# EAGLE board p8x-regbank-card-full (EAGLE 9.6.2)
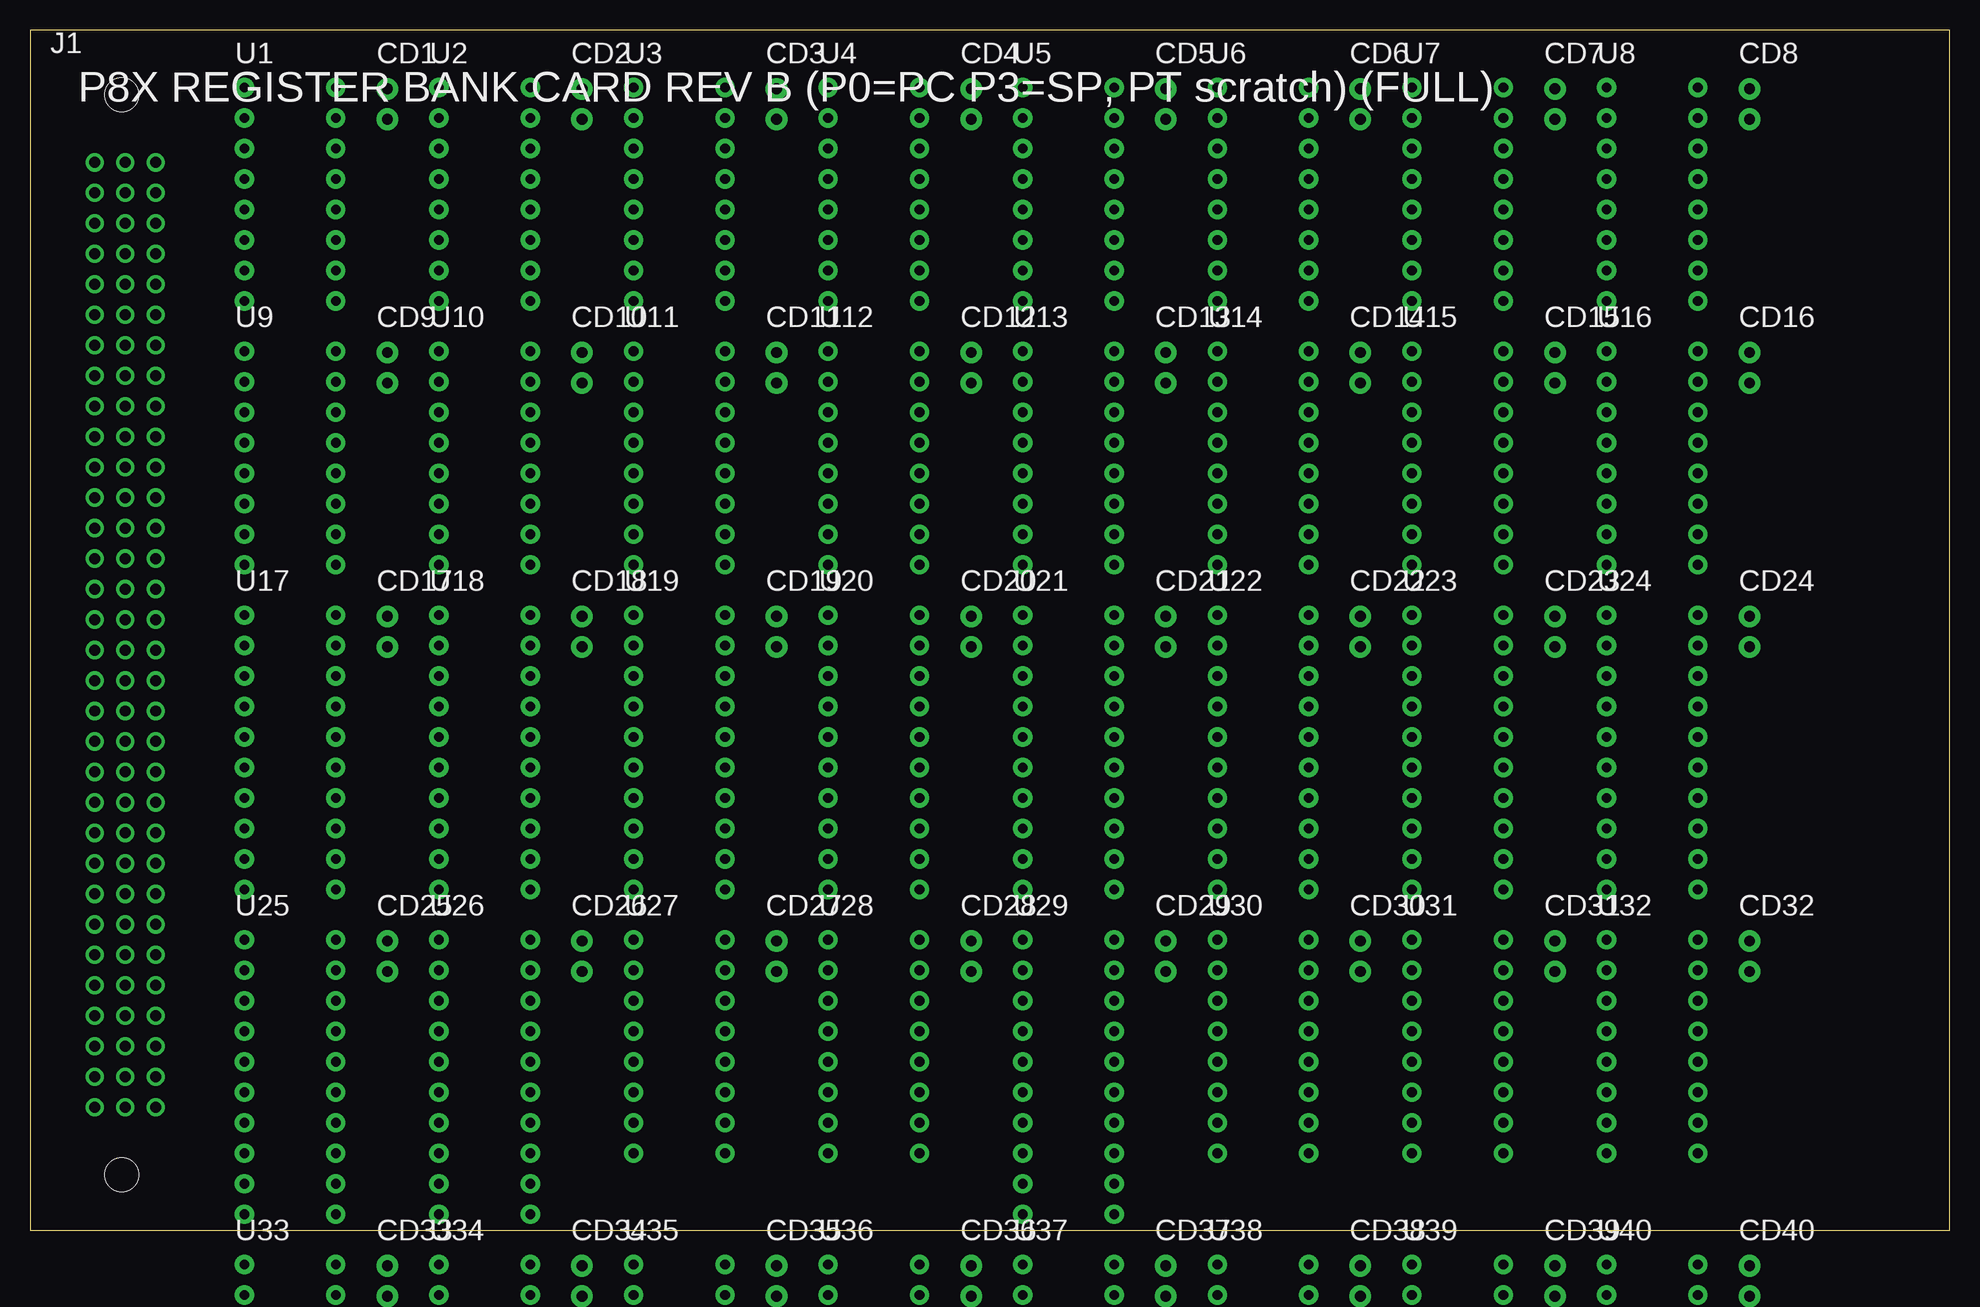
[diagram p0: board, top side]
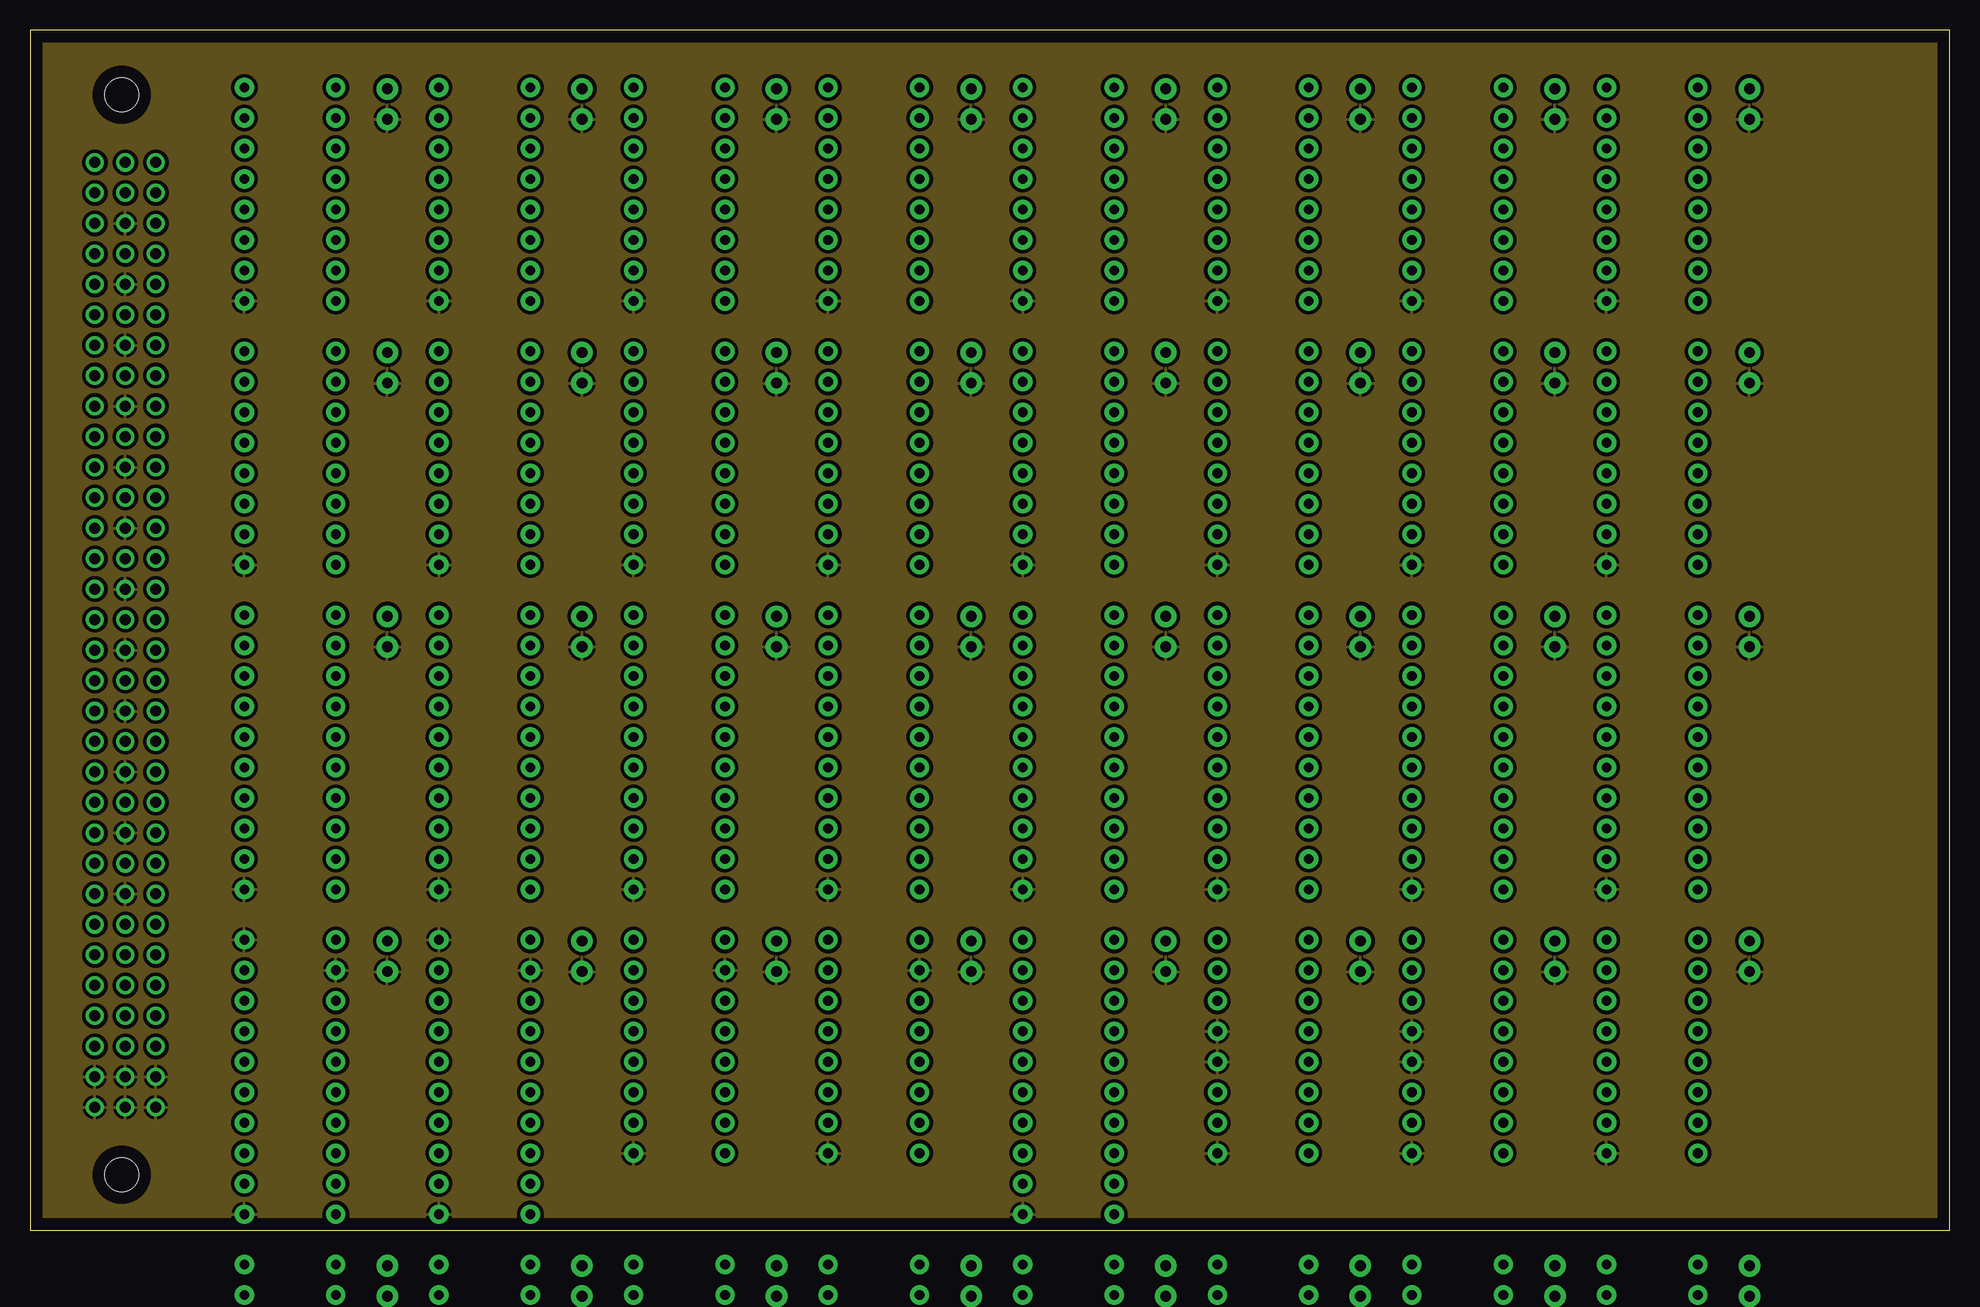
[diagram p1: board, inner layer Route2]
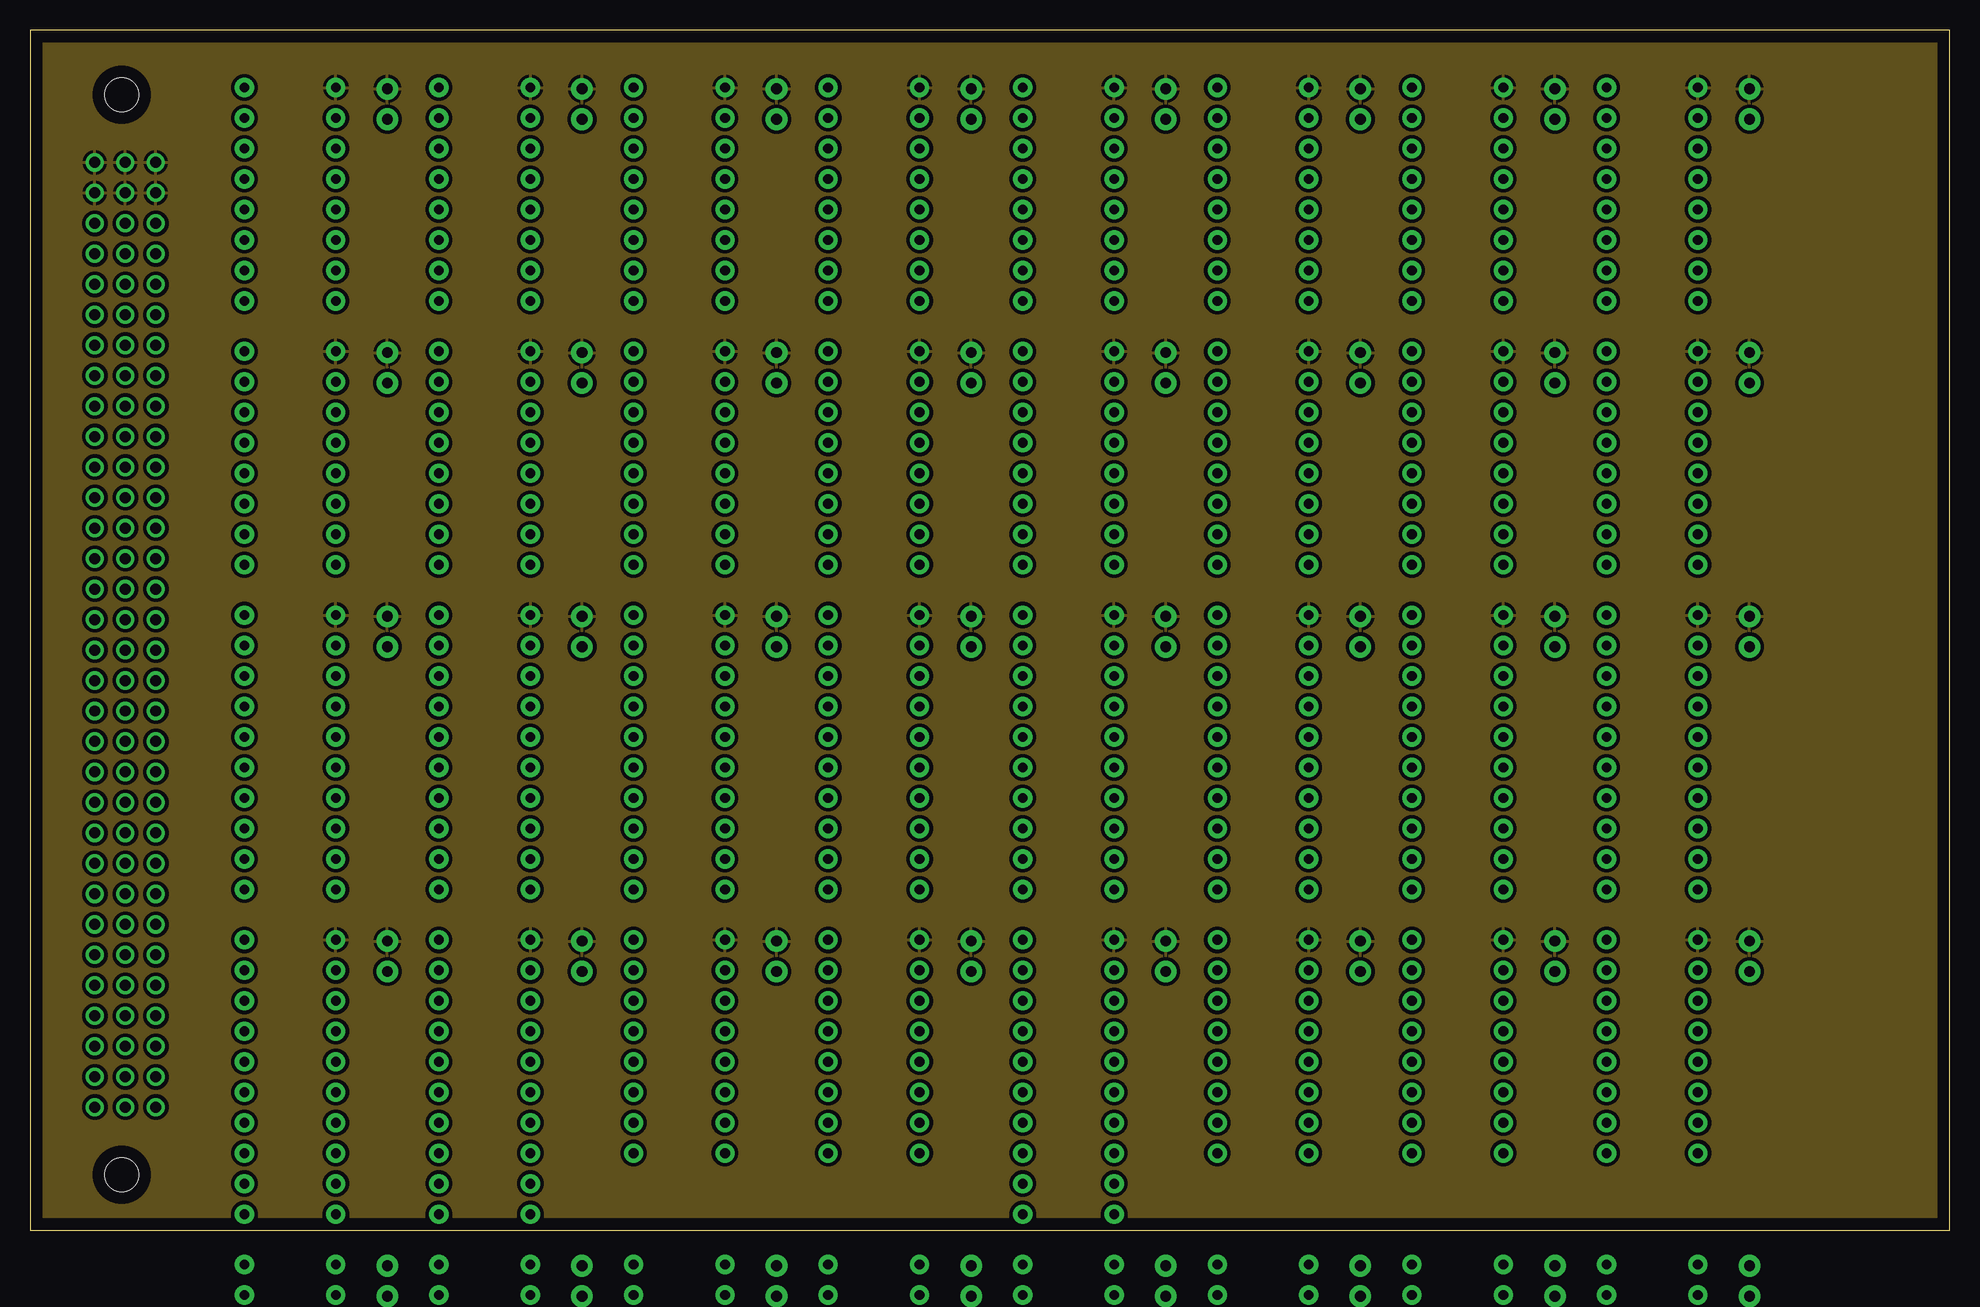
[diagram p2: board, inner layer Route15]

Size 160 x 100 mm. Coordinates in mm from the lower left corner, seen from the top.
Outline: 0,0 160,0 160,100 0,100 0,0
Copper layers (1*2*15*16): Top / Route2 / Route15 / Bottom

## Footprints (pad centres in the part's own frame; a part is rotated, then mirrored left to right if it is on the bottom)
C_DISC1 = drill 0.9 pad 1.8: 1 0,0; 2 0,-2.54
MABC96R = drill 0.914 pad 1.524: A1 -2.54,39.37; A2 -2.54,36.83; A3 -2.54,34.29; A4 -2.54,31.75; A5 -2.54,29.21; A6 -2.54,26.67; A7 -2.54,24.13; A8 -2.54,21.59; A9 -2.54,19.05; A10 -2.54,16.51; A11 -2.54,13.97; A12 -2.54,11.43; A13 -2.54,8.89; A14 -2.54,6.35; A15 -2.54,3.81; A16 -2.54,1.27; A17 -2.54,-1.27; A18 -2.54,-3.81; A19 -2.54,-6.35; A20 -2.54,-8.89; A21 -2.54,-11.43; A22 -2.54,-13.97; A23 -2.54,-16.51; A24 -2.54,-19.05; A25 -2.54,-21.59; A26 -2.54,-24.13; A27 -2.54,-26.67; A28 -2.54,-29.21; A29 -2.54,-31.75; A30 -2.54,-34.29; A31 -2.54,-36.83; A32 -2.54,-39.37; B1 0,39.37; B2 0,36.83; B3 0,34.29; B4 0,31.75; B5 0,29.21; B6 0,26.67; B7 0,24.13; B8 0,21.59; B9 0,19.05; B10 0,16.51; B11 0,13.97; B12 0,11.43; B13 0,8.89; B14 0,6.35; B15 0,3.81; B16 0,1.27; B17 0,-1.27; B18 0,-3.81; B19 0,-6.35; B20 0,-8.89; B21 0,-11.43; B22 0,-13.97; B23 0,-16.51; B24 0,-19.05; B25 0,-21.59; B26 0,-24.13; B27 0,-26.67; B28 0,-29.21; B29 0,-31.75; B30 0,-34.29; B31 0,-36.83; B32 0,-39.37; C1 2.54,39.37; C2 2.54,36.83; C3 2.54,34.29; C4 2.54,31.75; C5 2.54,29.21; C6 2.54,26.67; C7 2.54,24.13; C8 2.54,21.59; C9 2.54,19.05; C10 2.54,16.51; C11 2.54,13.97; C12 2.54,11.43; C13 2.54,8.89; C14 2.54,6.35; C15 2.54,3.81; C16 2.54,1.27; C17 2.54,-1.27; C18 2.54,-3.81; C19 2.54,-6.35; C20 2.54,-8.89; C21 2.54,-11.43; C22 2.54,-13.97; C23 2.54,-16.51; C24 2.54,-19.05; C25 2.54,-21.59; C26 2.54,-24.13; C27 2.54,-26.67; C28 2.54,-29.21; C29 2.54,-31.75; C30 2.54,-34.29; C31 2.54,-36.83; C32 2.54,-39.37 | hole 2.794: -0.3,45; -0.3,-45
LED5 = drill 0.9 pad 1.8: 1 2.54,0; 2 0,0
R_AXIAL = drill 0.8 pad 1.6: 1 0,0; 2 10.16,0
DIP16 = drill 0.813 pad 1.6: 1 0,0; 2 0,-2.54; 3 0,-5.08; 4 0,-7.62; 5 0,-10.16; 6 0,-12.7; 7 0,-15.24; 8 0,-17.78; 9 7.62,-17.78; 10 7.62,-15.24; 11 7.62,-12.7; 12 7.62,-10.16; 13 7.62,-7.62; 14 7.62,-5.08; 15 7.62,-2.54; 16 7.62,0
DIP20 = drill 0.813 pad 1.6: 1 0,0; 2 0,-2.54; 3 0,-5.08; 4 0,-7.62; 5 0,-10.16; 6 0,-12.7; 7 0,-15.24; 8 0,-17.78; 9 0,-20.32; 10 0,-22.86; 11 7.62,-22.86; 12 7.62,-20.32; 13 7.62,-17.78; 14 7.62,-15.24; 15 7.62,-12.7; 16 7.62,-10.16; 17 7.62,-7.62; 18 7.62,-5.08; 19 7.62,-2.54; 20 7.62,0
DIP14 = drill 0.813 pad 1.6: 1 0,0; 2 0,-2.54; 3 0,-5.08; 4 0,-7.62; 5 0,-10.16; 6 0,-12.7; 7 0,-15.24; 8 7.62,-15.24; 9 7.62,-12.7; 10 7.62,-10.16; 11 7.62,-7.62; 12 7.62,-5.08; 13 7.62,-2.54; 14 7.62,0

## Placement (x,y rotation side)
CD1  100nF  [C_DISC1]  29.79,95.1 0 top
CD2  100nF  [C_DISC1]  46.01,95.1 0 top
CD3  100nF  [C_DISC1]  62.23,95.1 0 top
CD4  100nF  [C_DISC1]  78.45,95.1 0 top
CD5  100nF  [C_DISC1]  94.67,95.1 0 top
CD6  100nF  [C_DISC1]  110.89,95.1 0 top
CD7  100nF  [C_DISC1]  127.11,95.1 0 top
CD8  100nF  [C_DISC1]  143.33,95.1 0 top
CD9  100nF  [C_DISC1]  29.79,73.12 0 top
CD10  100nF  [C_DISC1]  46.01,73.12 0 top
CD11  100nF  [C_DISC1]  62.23,73.12 0 top
CD12  100nF  [C_DISC1]  78.45,73.12 0 top
CD13  100nF  [C_DISC1]  94.67,73.12 0 top
CD14  100nF  [C_DISC1]  110.89,73.12 0 top
CD15  100nF  [C_DISC1]  127.11,73.12 0 top
CD16  100nF  [C_DISC1]  143.33,73.12 0 top
CD17  100nF  [C_DISC1]  29.79,51.14 0 top
CD18  100nF  [C_DISC1]  46.01,51.14 0 top
CD19  100nF  [C_DISC1]  62.23,51.14 0 top
CD20  100nF  [C_DISC1]  78.45,51.14 0 top
CD21  100nF  [C_DISC1]  94.67,51.14 0 top
CD22  100nF  [C_DISC1]  110.89,51.14 0 top
CD23  100nF  [C_DISC1]  127.11,51.14 0 top
CD24  100nF  [C_DISC1]  143.33,51.14 0 top
CD25  100nF  [C_DISC1]  29.79,24.08 0 top
CD26  100nF  [C_DISC1]  46.01,24.08 0 top
CD27  100nF  [C_DISC1]  62.23,24.08 0 top
CD28  100nF  [C_DISC1]  78.45,24.08 0 top
CD29  100nF  [C_DISC1]  94.67,24.08 0 top
CD30  100nF  [C_DISC1]  110.89,24.08 0 top
CD31  100nF  [C_DISC1]  127.11,24.08 0 top
CD32  100nF  [C_DISC1]  143.33,24.08 0 top
CD33  100nF  [C_DISC1]  29.79,-2.98 0 top
CD34  100nF  [C_DISC1]  46.01,-2.98 0 top
CD35  100nF  [C_DISC1]  62.23,-2.98 0 top
CD36  100nF  [C_DISC1]  78.45,-2.98 0 top
CD37  100nF  [C_DISC1]  94.67,-2.98 0 top
CD38  100nF  [C_DISC1]  110.89,-2.98 0 top
CD39  100nF  [C_DISC1]  127.11,-2.98 0 top
CD40  100nF  [C_DISC1]  143.33,-2.98 0 top
CD41  100nF  [C_DISC1]  29.79,-30.04 0 top  (outside the outline)
CD42  100nF  [C_DISC1]  46.01,-30.04 0 top  (outside the outline)
CD43  100nF  [C_DISC1]  62.23,-30.04 0 top  (outside the outline)
CD44  100nF  [C_DISC1]  78.45,-30.04 0 top  (outside the outline)
J1  MABC96R  [MABC96R]  7.94,49.6 0 top
LED3  GRN  [LED5]  97.21,-30.04 0 top  (outside the outline)
LED4  GRN  [LED5]  118.51,-30.04 0 top  (outside the outline)
LED5  YEL  [LED5]  139.81,-30.04 0 top  (outside the outline)
R4  1K  [R_AXIAL]  104.05,-29.94 0 top  (outside the outline)
R5  1K  [R_AXIAL]  125.35,-29.94 0 top  (outside the outline)
RP1  1K  [R_AXIAL]  82.75,-29.94 0 top  (outside the outline)
U1  74HCT169  [DIP16]  17.87,95.2 0 top
U2  74HCT169  [DIP16]  34.09,95.2 0 top
U3  74HCT169  [DIP16]  50.31,95.2 0 top
U4  74HCT169  [DIP16]  66.53,95.2 0 top
U5  74HCT169  [DIP16]  82.75,95.2 0 top
U6  74HCT169  [DIP16]  98.97,95.2 0 top
U7  74HCT169  [DIP16]  115.19,95.2 0 top
U8  74HCT169  [DIP16]  131.41,95.2 0 top
U9  74HCT169  [DIP16]  17.87,73.22 0 top
U10  74HCT169  [DIP16]  34.09,73.22 0 top
U11  74HCT169  [DIP16]  50.31,73.22 0 top
U12  74HCT169  [DIP16]  66.53,73.22 0 top
U13  74HCT169  [DIP16]  82.75,73.22 0 top
U14  74HCT169  [DIP16]  98.97,73.22 0 top
U15  74HCT169  [DIP16]  115.19,73.22 0 top
U16  74HCT169  [DIP16]  131.41,73.22 0 top
U17  74HCT244  [DIP20]  17.87,51.24 0 top
U18  74HCT244  [DIP20]  34.09,51.24 0 top
U19  74HCT244  [DIP20]  50.31,51.24 0 top
U20  74HCT244  [DIP20]  66.53,51.24 0 top
U21  74HCT244  [DIP20]  82.75,51.24 0 top
U22  74HCT244  [DIP20]  98.97,51.24 0 top
U23  74HCT244  [DIP20]  115.19,51.24 0 top
U24  74HCT244  [DIP20]  131.41,51.24 0 top
U25  74HCT244  [DIP20]  17.87,24.18 0 top
U26  74HCT244  [DIP20]  34.09,24.18 0 top
U27  74HCT257  [DIP16]  50.31,24.18 0 top
U28  74HCT257  [DIP16]  66.53,24.18 0 top
U29  74HCT244  [DIP20]  82.75,24.18 0 top
U30  74HCT138  [DIP16]  98.97,24.18 0 top
U31  74HCT138  [DIP16]  115.19,24.18 0 top
U32  74HCT139  [DIP16]  131.41,24.18 0 top
U33  74HCT138  [DIP16]  17.87,-2.88 0 top
U34  74HCT02  [DIP14]  34.09,-2.88 0 top
U35  74HCT14  [DIP14]  50.31,-2.88 0 top
U36  74HCT244  [DIP20]  66.53,-2.88 0 top
U37  74HCT08  [DIP14]  82.75,-2.88 0 top
U38  74HCT08  [DIP14]  98.97,-2.88 0 top
U39  74HCT139  [DIP16]  115.19,-2.88 0 top
U40  74HCT32  [DIP14]  131.41,-2.88 0 top
U41  74HCT377  [DIP20]  17.87,-29.94 0 top  (outside the outline)
U42  74HCT377  [DIP20]  34.09,-29.94 0 top  (outside the outline)
U43  74HCT244  [DIP20]  50.31,-29.94 0 top  (outside the outline)
U44  74HCT244  [DIP20]  66.53,-29.94 0 top  (outside the outline)

## Library data of the parts
CD1-CD44 J1 LED3-LED5 R4 R5 RP1 U1-U44 = p8x

## Nets
-CNT0: U1.7 U1.10 U2.7 U3.7 U4.7 U39.4
-CNT1: U5.7 U5.10 U6.7 U7.7 U8.7 U39.5
-CNT2: U9.7 U9.10 U10.7 U11.7 U12.7 U39.6
-CNT3: U13.7 U13.10 U14.7 U15.7 U16.7 U39.7
-LDH: U30.14 U37.13 U40.4 U40.12
-LDH0: U32.12 U37.4
-LDH0E: U3.9 U4.9 U37.6
-LDH1: U7.9 U8.9 U32.11
-LDH2: U11.9 U12.9 U32.10
-LDH3: U15.9 U16.9 U32.9
-LDH4: U40.11 U42.1
-LDHG: U32.15 U40.6
-LDL: U30.15 U37.12 U40.1 U40.9
-LDL0: U32.4 U37.1
-LDL0E: U1.9 U2.9 U37.3
-LDL1: U5.9 U6.9 U32.5
-LDL2: U9.9 U10.9 U32.6
-LDL3: U13.9 U14.9 U32.7
-LDL4: U40.8 U41.1
-LDLG: U32.1 U40.3
-LDP: U37.11 U38.4 U38.5
-POE: U29.1 U29.19 U37.8 U38.1 U38.2
-POEH: U31.14 U35.3 U37.10
-POEL: U31.15 U37.9
-RES: J1.A11 U36.1 U36.19 U37.2 U37.5
-SEL0: U17.1 U17.19 U18.1 U18.19 U33.15
-SEL1: U19.1 U19.19 U20.1 U20.19 U33.14
-SEL2: U21.1 U21.19 U22.1 U22.19 U33.13
-SEL3: U23.1 U23.19 U24.1 U24.19 U33.12
-SEL4: U33.11 U40.10 U40.13 U43.1 U43.19 U44.1 U44.19
A0: J1.C3 U25.18
A1: J1.C4 U25.16
A2: J1.C5 U25.14
A3: J1.C6 U25.12
A4: J1.C7 U25.9
A5: J1.C8 U25.7
A6: J1.C9 U25.5
A7: J1.C10 U25.3
A8: J1.C11 U26.18
A9: J1.C12 U26.16
A10: J1.C13 U26.14
A11: J1.C14 U26.12
A12: J1.C15 U26.9
A13: J1.C16 U26.7
A14: J1.C17 U26.5
A15: J1.C18 U26.3
CLK: J1.A24 U1.2 U2.2 U3.2 U4.2 U5.2 U6.2 U7.2 U8.2 U9.2 U10.2 U11.2 U12.2 U13.2 U14.2 U15.2 U16.2 U41.11 U42.11
CNTN: U34.1 U39.1
D0: J1.A3 U1.3 U3.3 U5.3 U7.3 U9.3 U11.3 U13.3 U15.3 U29.18 U36.18 U41.3 U42.3
D1: J1.A4 U1.4 U3.4 U5.4 U7.4 U9.4 U11.4 U13.4 U15.4 U29.16 U36.16 U41.4 U42.4
D2: J1.A5 U1.5 U3.5 U5.5 U7.5 U9.5 U11.5 U13.5 U15.5 U29.14 U36.14 U41.7 U42.7
D3: J1.A6 U1.6 U3.6 U5.6 U7.6 U9.6 U11.6 U13.6 U15.6 U29.12 U36.12 U41.8 U42.8
D4: J1.A7 U2.3 U4.3 U6.3 U8.3 U10.3 U12.3 U14.3 U16.3 U29.9 U36.9 U41.13 U42.13
D5: J1.A8 U2.4 U4.4 U6.4 U8.4 U10.4 U12.4 U14.4 U16.4 U29.7 U36.7 U41.14 U42.14
D6: J1.A9 U2.5 U4.5 U6.5 U8.5 U10.5 U12.5 U14.5 U16.5 U29.5 U36.5 U41.17 U42.17
D7: J1.A10 U2.6 U4.6 U6.6 U8.6 U10.6 U12.6 U14.6 U16.6 U29.3 U36.3 U41.18 U42.18
DLD0: J1.A16 U30.1
DLD1: J1.A17 U30.2
DLD2: J1.A18 U30.3
DLD3: J1.A19 U30.6
DOE0: J1.A12 U31.1
DOE1: J1.A13 U31.2
DOE2: J1.A14 U31.3
DOE3: J1.A15 U31.6
GND: CD1.2 CD2.2 CD3.2 CD4.2 CD5.2 CD6.2 CD7.2 CD8.2 CD9.2 CD10.2 CD11.2 CD12.2 CD13.2 CD14.2 CD15.2 CD16.2 CD17.2 CD18.2 CD19.2 CD20.2 CD21.2 CD22.2 CD23.2 CD24.2 CD25.2 CD26.2 CD27.2 CD28.2 CD29.2 CD30.2 CD31.2 CD32.2 CD33.2 CD34.2 CD35.2 CD36.2 CD37.2 CD38.2 CD39.2 CD40.2 CD41.2 CD42.2 CD43.2 CD44.2 J1.A31 J1.A32 J1.B3 J1.B5 J1.B7 J1.B9 J1.B11 J1.B13 J1.B15 J1.B17 J1.B19 J1.B21 J1.B23 J1.B25 J1.B31 J1.B32 J1.C31 J1.C32 LED3.1 U1.8 U2.8 U3.8 U4.8 U5.8 U6.8 U7.8 U8.8 U9.8 U10.8 U11.8 U12.8 U13.8 U14.8 U15.8 U16.8 U17.10 U18.10 U19.10 U20.10 U21.10 U22.10 U23.10 U24.10 U25.1 U25.10 U25.19 U26.1 U26.10 U26.19 U27.8 U27.15 U28.8 U28.15 U29.10 U30.4 U30.5 U30.8 U31.4 U31.5 U31.8 U32.8 U33.4 U33.5 U33.8 U34.5 U34.6 U34.7 U34.8 U34.9 U34.11 U34.12 U35.5 U35.7 U35.9 U35.11 U35.13 U36.2 U36.4 U36.6 U36.8 U36.10 U36.11 U36.13 U36.15 U36.17 U37.7 U38.7 U38.9 U38.10 U38.12 U38.13 U39.8 U39.13 U39.14 U40.7 U41.10 U42.10 U43.10 U44.10
LDK: LED5.1 U38.6
LEDLD: LED5.2 R5.2
LEDP: LED3.2 RP1.2
LEDRD: LED4.2 R4.2
PB0: U17.18 U19.18 U21.18 U23.18 U25.2 U27.2 U43.18
PB1: U17.16 U19.16 U21.16 U23.16 U25.4 U27.5 U43.16
PB2: U17.14 U19.14 U21.14 U23.14 U25.6 U27.11 U43.14
PB3: U17.12 U19.12 U21.12 U23.12 U25.8 U27.14 U43.12
PB4: U17.9 U19.9 U21.9 U23.9 U25.11 U28.2 U43.9
PB5: U17.7 U19.7 U21.7 U23.7 U25.13 U28.5 U43.7
PB6: U17.5 U19.5 U21.5 U23.5 U25.15 U28.11 U43.5
PB7: U17.3 U19.3 U21.3 U23.3 U25.17 U28.14 U43.3
PB8: U18.18 U20.18 U22.18 U24.18 U26.2 U27.3 U44.18
PB9: U18.16 U20.16 U22.16 U24.16 U26.4 U27.6 U44.16
PB10: U18.14 U20.14 U22.14 U24.14 U26.6 U27.10 U44.14
PB11: U18.12 U20.12 U22.12 U24.12 U26.8 U27.13 U44.12
PB12: U18.9 U20.9 U22.9 U24.9 U26.11 U28.3 U44.9
PB13: U18.7 U20.7 U22.7 U24.7 U26.13 U28.6 U44.7
PB14: U18.5 U20.5 U22.5 U24.5 U26.15 U28.10 U44.5
PB15: U18.3 U20.3 U22.3 U24.3 U26.17 U28.13 U44.3
PDEC: J1.A23 U34.3 U35.1
PINC: J1.A22 U34.2
POEHP: U27.1 U28.1 U35.4
PQ0_0: U1.14 U17.2
PQ0_1: U1.13 U17.4
PQ0_2: U1.12 U17.6
PQ0_3: U1.11 U17.8
PQ0_4: U2.14 U17.11
PQ0_5: U2.13 U17.13
PQ0_6: U2.12 U17.15
PQ0_7: U2.11 U17.17
PQ0_8: U3.14 U18.2
PQ0_9: U3.13 U18.4
PQ0_10: U3.12 U18.6
PQ0_11: U3.11 U18.8
PQ0_12: U4.14 U18.11
PQ0_13: U4.13 U18.13
PQ0_14: U4.12 U18.15
PQ0_15: U4.11 U18.17
PQ1_0: U5.14 U19.2
PQ1_1: U5.13 U19.4
PQ1_2: U5.12 U19.6
PQ1_3: U5.11 U19.8
PQ1_4: U6.14 U19.11
PQ1_5: U6.13 U19.13
PQ1_6: U6.12 U19.15
PQ1_7: U6.11 U19.17
PQ1_8: U7.14 U20.2
PQ1_9: U7.13 U20.4
PQ1_10: U7.12 U20.6
PQ1_11: U7.11 U20.8
PQ1_12: U8.14 U20.11
PQ1_13: U8.13 U20.13
PQ1_14: U8.12 U20.15
PQ1_15: U8.11 U20.17
PQ2_0: U9.14 U21.2
PQ2_1: U9.13 U21.4
PQ2_2: U9.12 U21.6
PQ2_3: U9.11 U21.8
PQ2_4: U10.14 U21.11
PQ2_5: U10.13 U21.13
PQ2_6: U10.12 U21.15
PQ2_7: U10.11 U21.17
PQ2_8: U11.14 U22.2
PQ2_9: U11.13 U22.4
PQ2_10: U11.12 U22.6
PQ2_11: U11.11 U22.8
PQ2_12: U12.14 U22.11
PQ2_13: U12.13 U22.13
PQ2_14: U12.12 U22.15
PQ2_15: U12.11 U22.17
PQ3_0: U13.14 U23.2
PQ3_1: U13.13 U23.4
PQ3_2: U13.12 U23.6
PQ3_3: U13.11 U23.8
PQ3_4: U14.14 U23.11
PQ3_5: U14.13 U23.13
PQ3_6: U14.12 U23.15
PQ3_7: U14.11 U23.17
PQ3_8: U15.14 U24.2
PQ3_9: U15.13 U24.4
PQ3_10: U15.12 U24.6
PQ3_11: U15.11 U24.8
PQ3_12: U16.14 U24.11
PQ3_13: U16.13 U24.13
PQ3_14: U16.12 U24.15
PQ3_15: U16.11 U24.17
PSEL0: J1.A20 U32.2 U32.14 U33.1 U39.2
PSEL1: J1.A21 U32.3 U32.13 U33.2 U39.3
PSEL2: J1.C27 U33.3 U40.2 U40.5
PTQ0_0: U41.2 U43.2
PTQ0_1: U41.5 U43.4
PTQ0_2: U41.6 U43.6
PTQ0_3: U41.9 U43.8
PTQ0_4: U41.12 U43.11
PTQ0_5: U41.15 U43.13
PTQ0_6: U41.16 U43.15
PTQ0_7: U41.19 U43.17
PTQ1_0: U42.2 U44.2
PTQ1_1: U42.5 U44.4
PTQ1_2: U42.6 U44.6
PTQ1_3: U42.9 U44.8
PTQ1_4: U42.12 U44.11
PTQ1_5: U42.15 U44.13
PTQ1_6: U42.16 U44.15
PTQ1_7: U42.19 U44.17
RB0: U27.4 U29.2
RB1: U27.7 U29.4
RB2: U27.9 U29.6
RB3: U27.12 U29.8
RB4: U28.4 U29.11
RB5: U28.7 U29.13
RB6: U28.9 U29.15
RB7: U28.12 U29.17
RC0_0: U1.15 U2.10
RC0_1: U2.15 U3.10
RC0_2: U3.15 U4.10
RC1_0: U5.15 U6.10
RC1_1: U6.15 U7.10
RC1_2: U7.15 U8.10
RC2_0: U9.15 U10.10
RC2_1: U10.15 U11.10
RC2_2: U11.15 U12.10
RC3_0: U13.15 U14.10
RC3_1: U14.15 U15.10
RC3_2: U15.15 U16.10
RDK: LED4.1 U38.3
UDB: U1.1 U2.1 U3.1 U4.1 U5.1 U6.1 U7.1 U8.1 U9.1 U10.1 U11.1 U12.1 U13.1 U14.1 U15.1 U16.1 U35.2
VCC: CD1.1 CD2.1 CD3.1 CD4.1 CD5.1 CD6.1 CD7.1 CD8.1 CD9.1 CD10.1 CD11.1 CD12.1 CD13.1 CD14.1 CD15.1 CD16.1 CD17.1 CD18.1 CD19.1 CD20.1 CD21.1 CD22.1 CD23.1 CD24.1 CD25.1 CD26.1 CD27.1 CD28.1 CD29.1 CD30.1 CD31.1 CD32.1 CD33.1 CD34.1 CD35.1 CD36.1 CD37.1 CD38.1 CD39.1 CD40.1 CD41.1 CD42.1 CD43.1 CD44.1 J1.A1 J1.A2 J1.B1 J1.B2 J1.C1 J1.C2 R4.1 R5.1 RP1.1 U1.16 U2.16 U3.16 U4.16 U5.16 U6.16 U7.16 U8.16 U9.16 U10.16 U11.16 U12.16 U13.16 U14.16 U15.16 U16.16 U17.20 U18.20 U19.20 U20.20 U21.20 U22.20 U23.20 U24.20 U25.20 U26.20 U27.16 U28.16 U29.20 U30.16 U31.16 U32.16 U33.6 U33.16 U34.14 U35.14 U36.20 U37.14 U38.14 U39.15 U39.16 U40.14 U41.20 U42.20 U43.20 U44.20

## Tracks (layer width: path | path; a pad name or v marks a point on that pad's centre or on a via)
GND
  pour Route2 (isolate 0.3): 0,0 160,0 160,100 0,100
VCC
  pour Route15 (isolate 0.3): 0,0 160,0 160,100 0,100

## Text on the board
tPlace: P8X REGISTER BANK CARD REV B (P0=PC P3=SP, PT scratch) (FULL)